# Altium PCB protel_wireless_remote.PcbDoc
Units mil, origin at the board's own origin, x right, y up, seen from the top; angles counter-clockwise.
Board outline 2200 x 900 mil, 2 copper layers (Top Layer, Bottom Layer); 15 components, 16 nets, 41 pads, 3 vias.
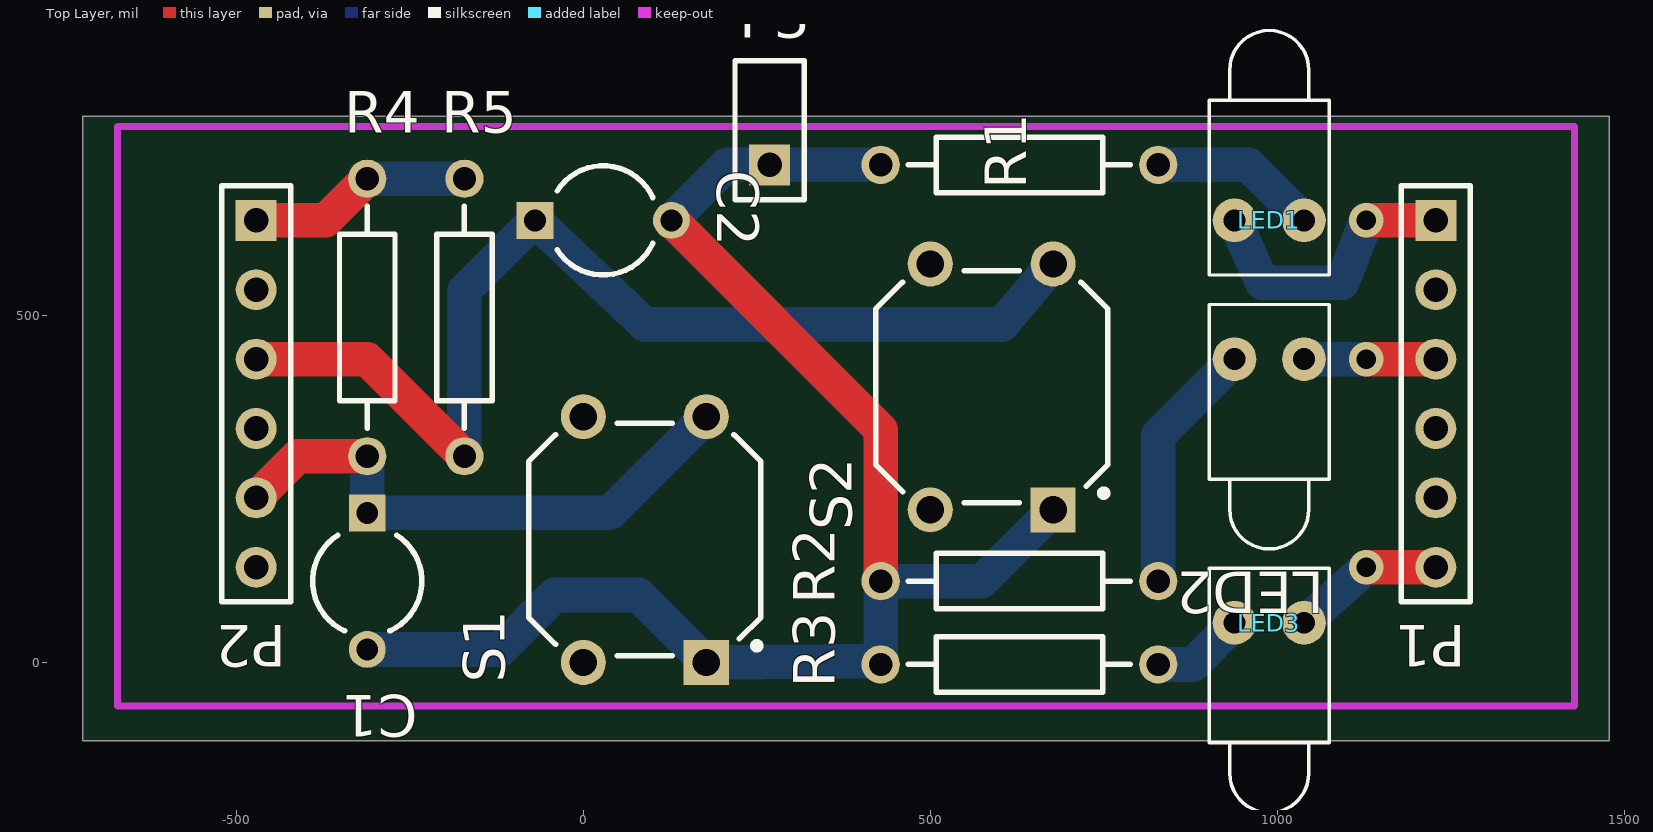
[diagram p0: Top Layer view]
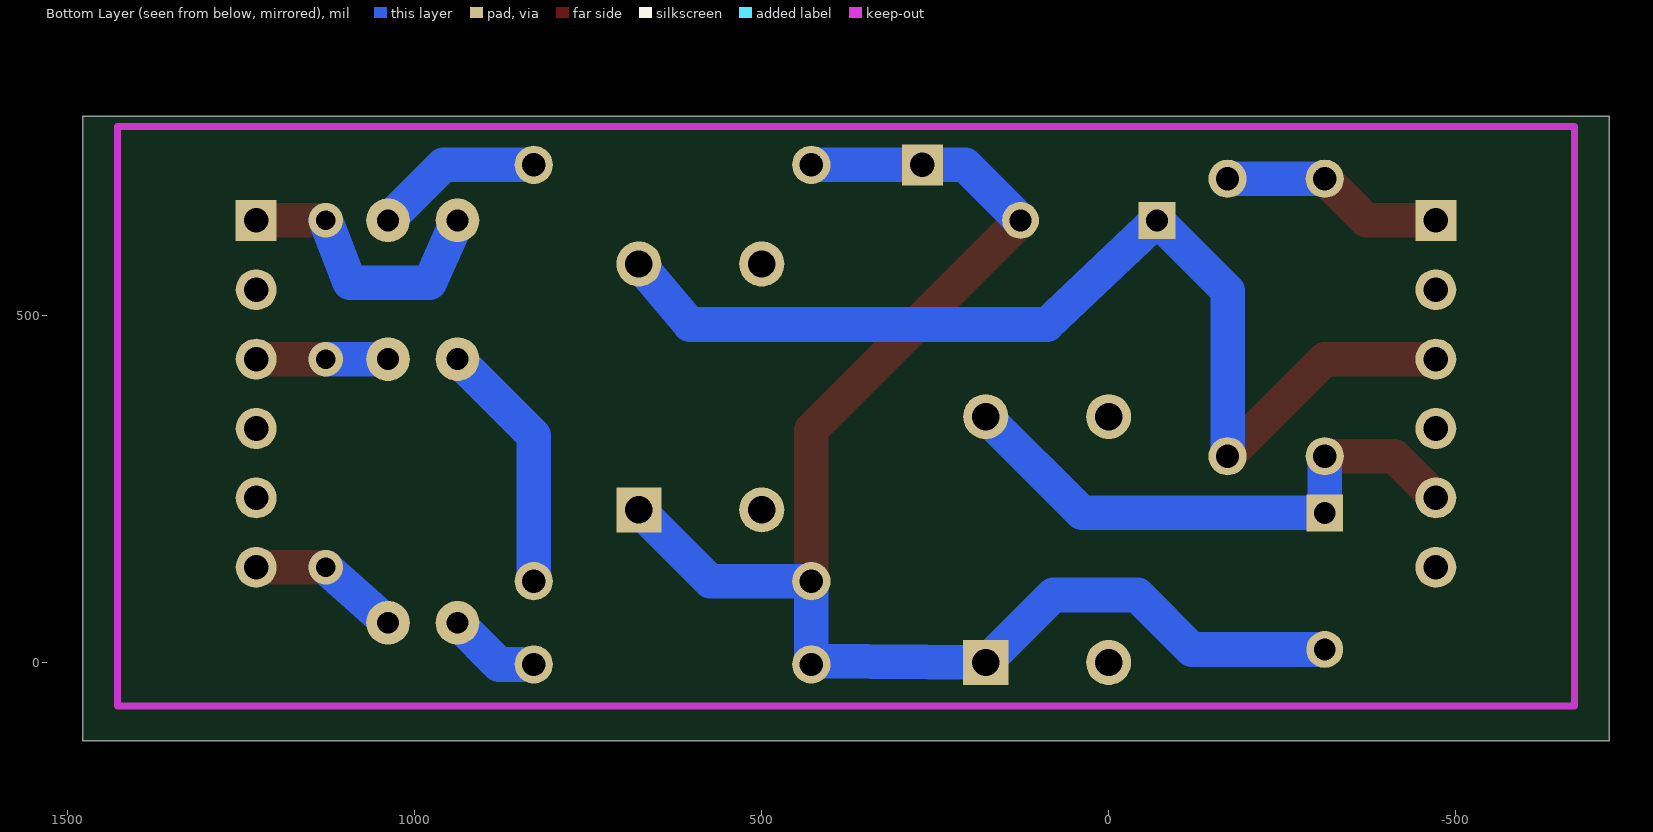
[diagram p1: Bottom Layer view, seen from below]

## Layer stack, top to bottom
Top Layer: signal copper 1.4
Dielectric: dielectric 12.6, FR-4, Dk 4.8
Bottom Layer: signal copper 1.4

## Board outline
-721.42,-112.83 1478.58,-112.83 1478.58,787.17 -721.42,787.17

## Design rules (kind name [scope] priority, off if disabled: settings)
Clearance [All] p1: gap=13
ComponentClearance [All] p1: gap=10 collisioncheckmode=0
PolygonConnect [All] p1: connectstyle=Relief reliefconductorwidth=10 reliefentries=4 polygonreliefangle="90 Angle"
RoutingVias [All] p1: holewidth=32 width=62 viastyle="Through Hole" minholewidth=28 minwidth=50 maxholewidth=28 maxwidth=50
SolderMaskExpansion [All] p1: expansion=4
TestPointUsage [All] p1: valid=0 allowmultiple=FALSE
Testpoint [All] p1: side=15 testpointundercomponent=TRUE minsize=40 maxsize=100 preferedsize=60 minholesize=0 maxholesize=40 preferedholesize=32 testpointgrid=1 style=1023 order=-539222988
Width [All] p1: maxlimit=50 minlimit=50 preferedwidth=50
17 further rules are at their usual default settings.

## Components (designator, comment, footprint, x,y, rotation, side; value= is the part's Value field where it differs from the comment)
C1 "Cap2" CAPR5-4X5 -311.42,117.17 r270 top
C2 "Cap2" CAPR5-4X5 28.58,637.17 r0 top
LED1 "Green" LED-1 988.58,637.17 r90 top
LED2 "Yellow" LED-1 988.58,437.17 r270 top
LED3 "Red" LED-1 988.58,57.17 r270 top
P1 "I/O" HDR1X6 1228.58,637.17 r270 top
P2 "I/O" HDR1X6 -471.42,637.17 r270 top
P3 "Ground" HDR1X2 268.58,717.17 r90 top
R1 "Res" AXIAL-0.4 628.58,717.17 r180 top
R2 "Res" AXIAL-0.4 628.58,117.17 r180 top
R3 "Res" AXIAL-0.4 628.58,-2.83 r180 top
R4 "Res" AXIAL-0.4 -311.42,497.17 r90 top
R5 "Res" AXIAL-0.4 -171.42,497.17 r90 top
S1 "Reset" IT-2175 88.58,177.17 r90 top
S2 "Reset" IT-2175 588.58,397.17 r90 top

## Footprints (in the part's own frame and the unit in brackets; to place one, negate y for a bottom-side part, rotate by r counter-clockwise, add the part's x,y. Pads: shape width x height; smd on the part's side, far side on the other; paste and mask are expansions set on the pad)
AXIAL-0.4 [mm] "Resistor; 2 Leads"
  round 1.4 hole 0.85: 1(-5.08,0) 2(5.08,0)
  silkscreen extent -4.06,-1.02 4.06,1.02
CAPR5-4X5 [mm] "Capacitor; 2 Leads"
  rect 1.35x1.35 hole 0.8: 1(-2.5,0)
  round 1.35 hole 0.8: 2(2.5,0)
  silkscreen extent -1.69,-2 1.82,2
HDR1X2 [mm] "Connector; Header; 2 Position"
  rect 1.5x1.5 hole 0.9: 1(0,0)
  silkscreen extent -1.27,-1.27 3.81,1.27
HDR1X6 [mm] "Connector; Header; 6 Position"
  rect 1.5x1.5 hole 0.9: 1(0,0)
  round 1.5 hole 0.9: 2(2.54,0) 3(5.08,0) 4(7.62,0) 5(10.16,0) 6(12.7,0)
  silkscreen extent -1.27,-1.27 13.97,1.27
IT-2175 [mm] "Switch, Push Button, Thru-Hole; 4 Leads; Body 8.5 x 8.5 mm (LxW typ); Row Spacing 9.0 mm; Pitch 4.5 mm"
  rect 1.65x1.65 hole 1: 1(-4.5,-2.25)
  round 1.65 hole 1: 2(4.5,-2.25) 3(-4.5,2.25) 4(4.5,2.25)
  silkscreen extent -4.25,-4.25 4.25,4.25
LED-1 [mm] "Typical RED GaAs LED; 2 Leads"
  round 1.6 hole 0.8: 1(0,1.27) 2(0,-1.27)
  silkscreen extent -2,-2.2 6.95,2.2

## Part data
C1 C2: "Capacitor"
LED1 LED2 LED3: library part LED1, "Typical RED GaAs LED"
P1 P2: library part "Header 6", "Header, 6-Pin"
P3: library part "Header 2", "Header, 2-Pin"
R1 R2 R3 R4 R5: library part Res2, "Resistor"
S1 S2: library part IT-2175, "Tactile Switch, DPST; Thru-Hole; Vertical; Rating DC 12V, 50mA (max)"

## Via types
v1: diameter 50, hole 28, Top Layer to Bottom Layer, 3 vias

## Nets (pads, with @x,y where several pads share a name; then routed paths per layer and width w, separated by ;. In a path a pad name is that pad's centre, name@x,y a point inside that pad or via, vN(x,y) a via of type N, cw(c..) or ccw(c..) an arc to the next point about the centre after c; other vN are vias at no path point)
2: LED3.1 P1.6 | length 220.4
  Top Layer w50: v1(1128.58,137.17) P1.6
  Bottom Layer w50: LED3.1 v1(1128.58,137.17)
3: P1.5
4: P1.4
5: LED2.1 P1.3 | length 190
  Top Layer w50: v1(1128.58,437.17) P1.3
  Bottom Layer w50: LED2.1 v1(1128.58,437.17)
6: P1.2
7: LED1.1 P1.1 | length 410.1
  Top Layer w50: v1(1128.58,637.17) P1.1
  Bottom Layer w50: LED1.1 978.58,547.17 1093.58,547.17 v1(1128.58,637.17)
A0: P2.1 R4.2 R5.2 | length 324.9
  Top Layer w50: P2.1 -371.42,637.17 R4.2
  Bottom Layer w50: R4.2 R5.2
A1: P2.2
A2: C2.1 P2.3 R5.1 S2.2 | length 1587.3
  Top Layer w50: P2.3 -311.42,437.17 R5.1
  Bottom Layer w50: R5.1 -171.42,535.59 C2.1 88.58,487.17 603.58,487.17 S2.2
A3: P2.4
A4: C1.1 P2.5 R4.1 S1.2 | length 812.5
  Top Layer w50: P2.5 -411.42,297.17 R4.1
  Bottom Layer w50: R4.1 C1.1 38.42,215.59 S1.2
A5: P2.6
GND: C1.2 C2.2 P3.1 R1.2 R2.2 R3.2 S1.1 S2.1 | length 2203.5
  Top Layer w50: C2.2 428.58,335.59 R2.2
  Bottom Layer w50: C1.2 -119.84,18.74 -41.42,97.17 80,97.17 S1.1 R3.2@428.54,2.17 ; C2.2 207.01,717.17 P3.1 R1.2 ; R3.2 428.58,2.17 R2.2 574.33,117.17 S2.1
NetLED1_2: LED1.2 R1.1 | length 243.1
  Bottom Layer w50: R1.1 958.58,717.17 LED1.2
NetLED2_2: LED2.2 R2.1 | length 365.6
  Bottom Layer w50: R2.1 828.58,327.17 LED2.2
NetLED3_2: LED3.2 R3.1 | length 134.9
  Bottom Layer w50: R3.1 878.58,-2.83 LED3.2
pads on no net: S1.3 S1.4 S2.3 S2.4

## Keep-outs
Keep-Out Layer:
  lines w10: -671.42,-62.83 1428.58,-62.83 1428.58,772.17 -671.42,772.17 -671.42,-62.83

## Dimensions
-671.42,-62.83 to 1428.58,-62.83 on Mechanical 1
-671.42,-62.83 to -671.42,772.17 on Mechanical 1